# Altium PCB EPM3032_breakout.PcbDoc
Units mil, origin at the board's own origin, x right, y up, seen from the top; angles counter-clockwise.
Board outline 1250 x 1900 mil, 2 copper layers (Top Layer, Bottom Layer); 7 components, 33 nets, 86 pads, 1 vias.
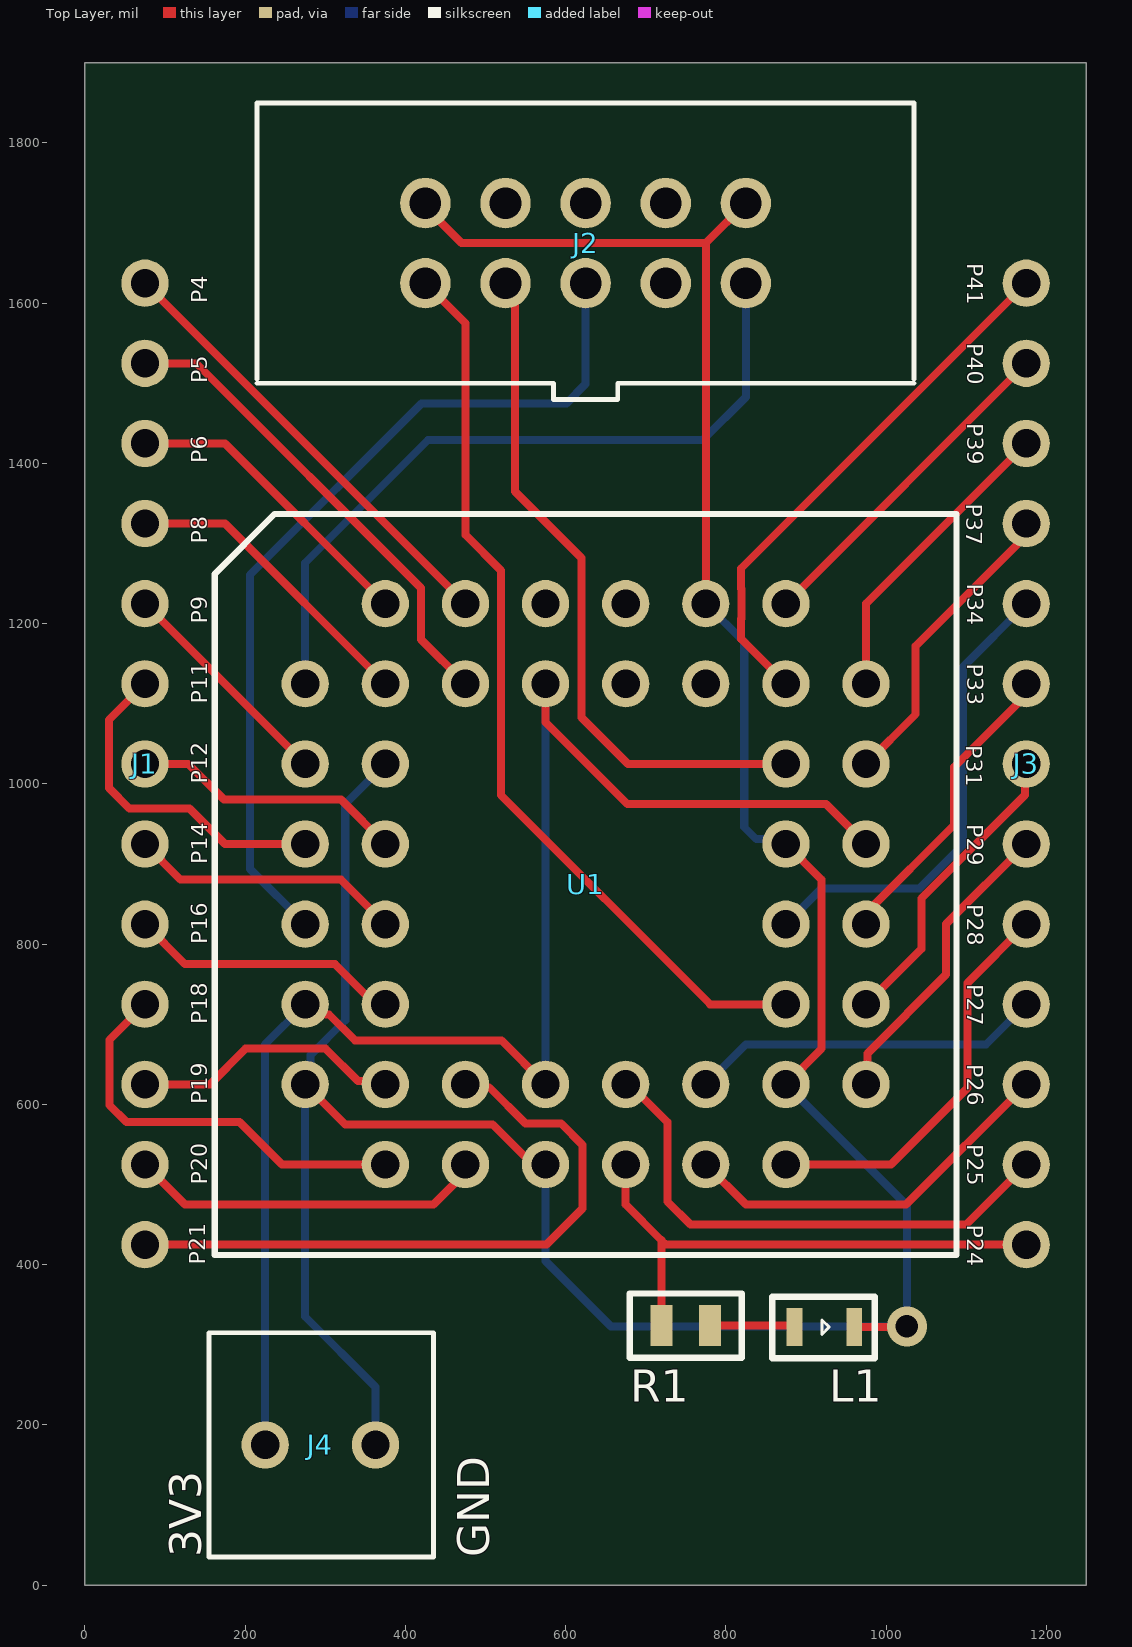
[diagram p0: Top Layer view]
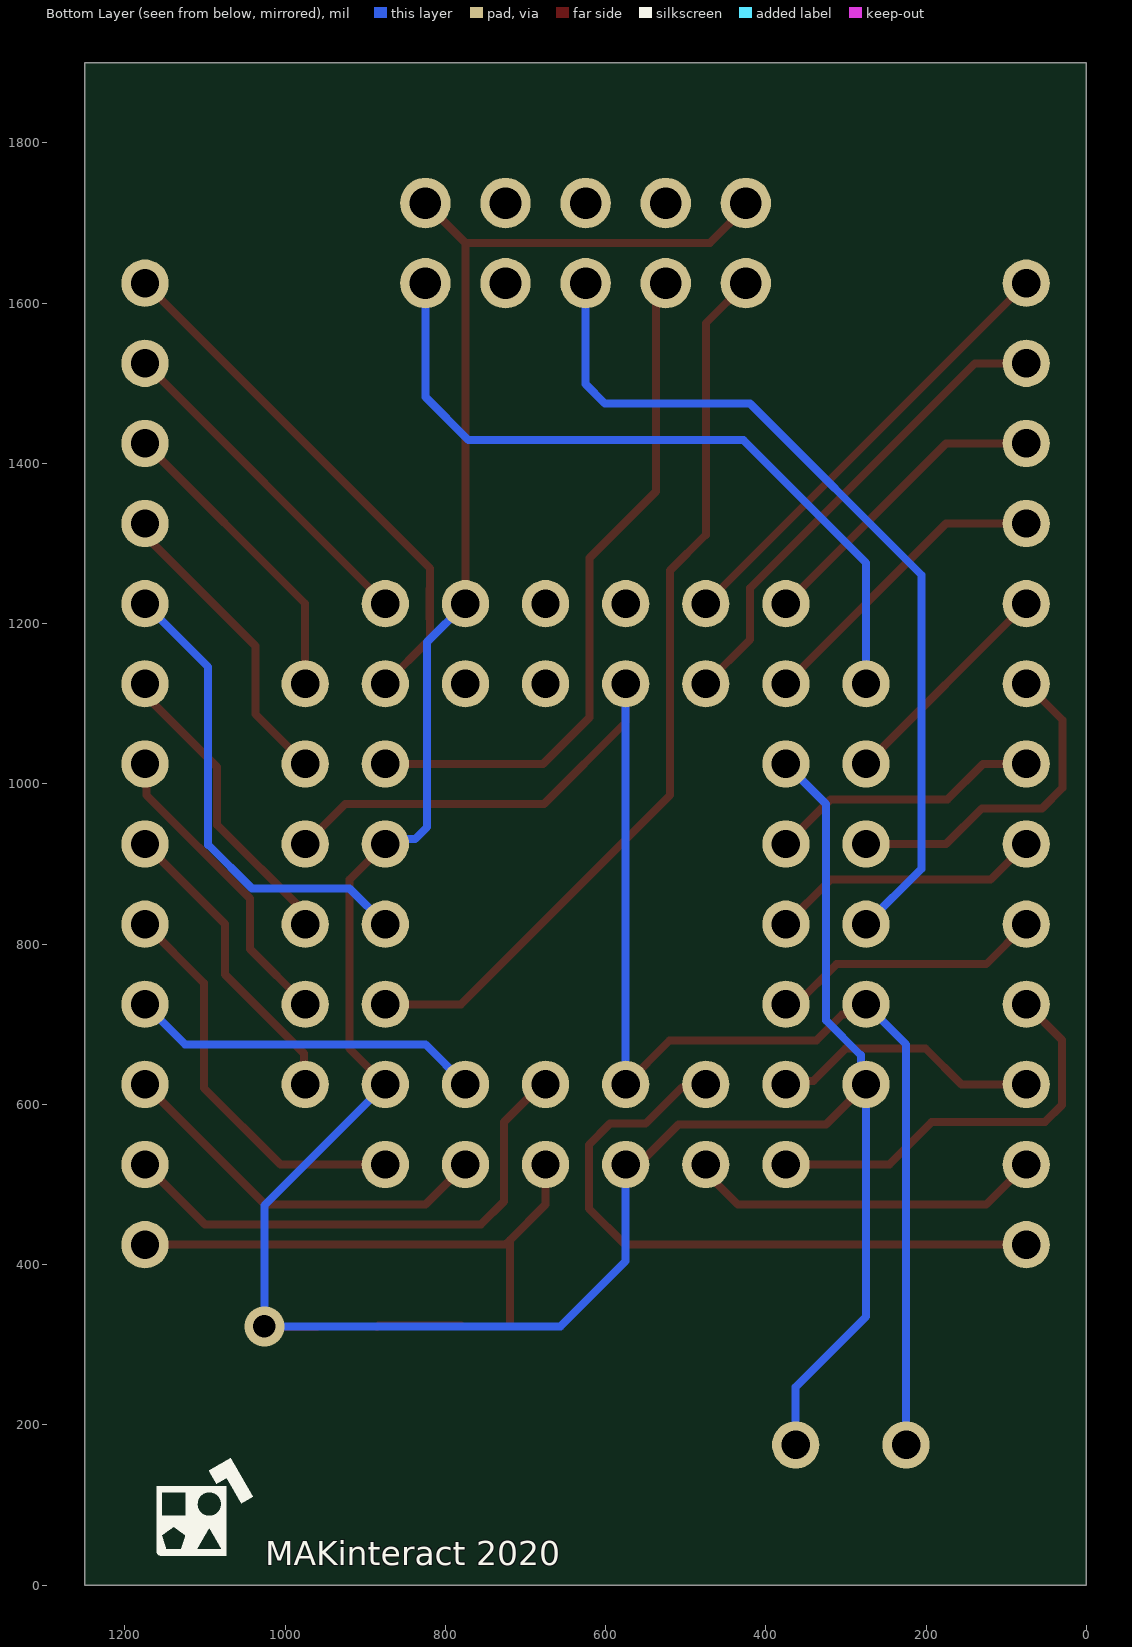
[diagram p1: Bottom Layer view, seen from below]
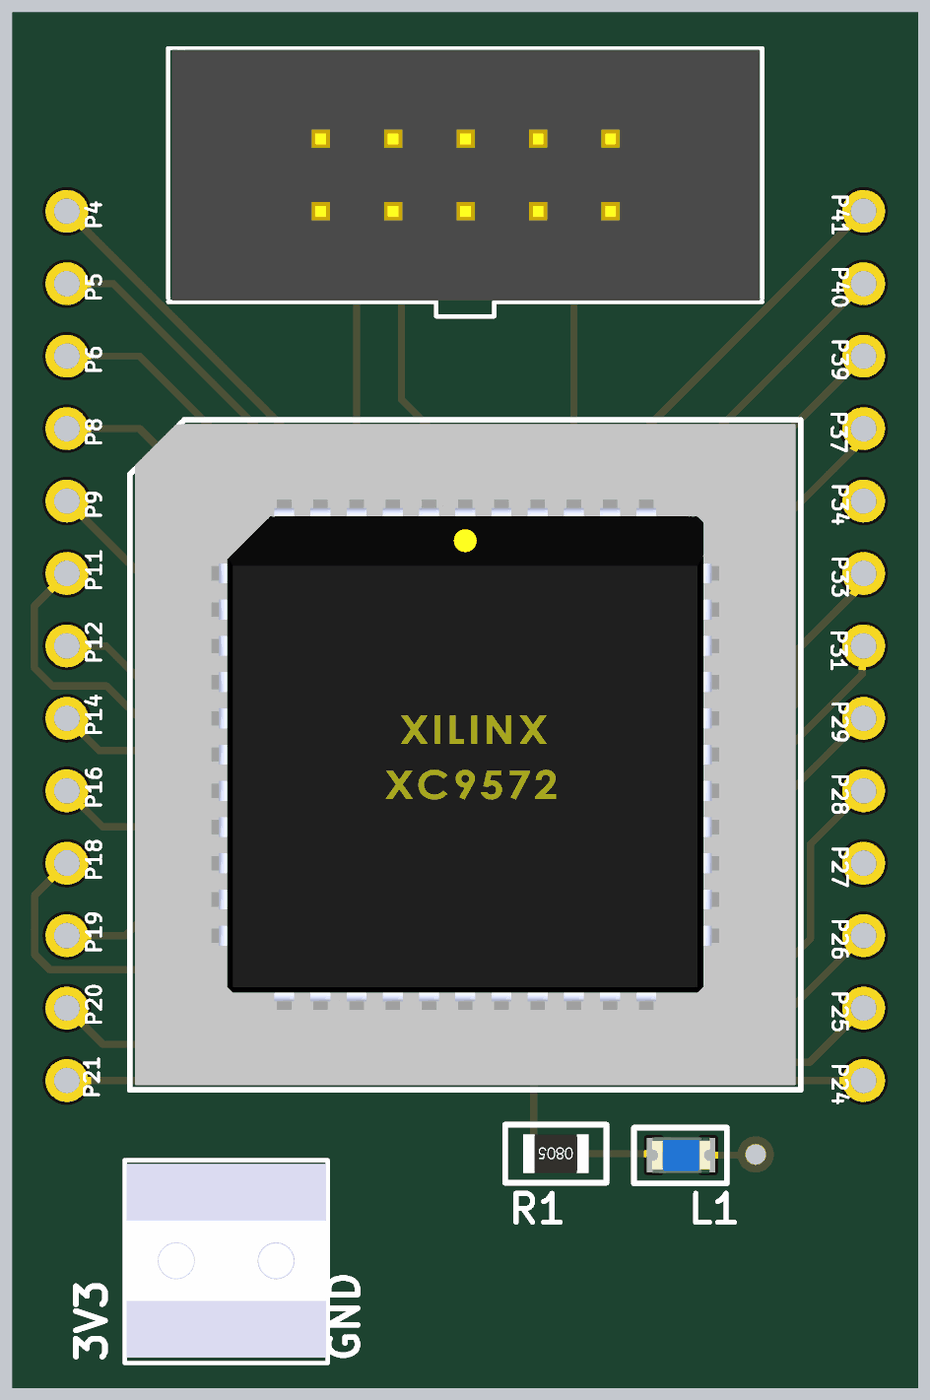
[diagram p2: 3D render of the assembled board from above, using the file's embedded part models]

## Layer stack, top to bottom
Top Solder: solder mask 0.4, Solder Resist, Dk 3.5
Top Layer: signal copper 1.4
Dielectric 1: dielectric 12.6, FR-4, Dk 4.8
Bottom Layer: signal copper 1.4
Bottom Solder: solder mask 0.4, Solder Resist, Dk 3.5

## Board outline
0,0 1250,0 1250,1900 0,1900

## Design rules (kind name [scope] priority, off if disabled: settings)
Clearance [All] p1: gap=10 ignorepadtopadclearanceinfootprint=FALSE except(0: Arc-Hole Track-Hole SMDPad-Hole THPad-Hole Via-Hole Fill-Hole Poly-Hole Region-Hole Text-Hole)
PolygonConnect [All] p1: connectstyle=Relief reliefconductorwidth=10 reliefentries=4 polygonreliefangle="90 Angle" airgapwidth=10
RoutingVias [All] p1: holewidth=28 width=50 viastyle="Through Hole" minholewidth=28 minwidth=50 maxholewidth=28 maxwidth=50
SilkToSilkClearance [All] p1: silktosilkclearance=5
SolderMaskExpansion [All] p1: expansion=4
Width [All] p1: maxlimit=10 minlimit=10 preferedwidth=10
29 further rules are at their usual default settings.

## Components (designator, comment, footprint, x,y, rotation, side; value= is the part's Value field where it differs from the comment)
J1 "connector_1x13" CONECTOR_1X13 75,1625 r270 top
J2 "ALTERA BLASTER" ALTERA_BLASTER 425,1625 r0 top locked
J3 "connector_1x13" CONECTOR_1X13 1175,425 r90 top
J4 "282837-2" 282837-2 225,175 r0 top
L1 "LED0805" LED0805 923,322 r180 top
R1 "300" R0805 750,324 r180 top
U1 "EPM3064ALC44-10" PLCC44_DIP 625,875 r0 top locked

## Footprints (in the part's own frame and the unit in brackets; to place one, negate y for a bottom-side part, rotate by r counter-clockwise, add the part's x,y. Pads: shape width x height; smd on the part's side, far side on the other; paste and mask are expansions set on the pad)
282837-2 [mm]
  round 1.5 hole 0.9: 1(0,0) 2(3.5,0)
  silkscreen extent -1.78,-3.56 5.33,3.56, body extent -1.72,-3.37 5.28,3.43, height 9.2
ALTERA_BLASTER [mm]
  round 1.6 hole 1: 1(0,0) 2(0,2.54) 3(2.54,0) 4(2.54,2.54) 5(5.08,0) 6(5.08,2.54) 7(7.62,0) 8(7.62,2.54) 9(10.16,0) 10(10.16,2.54)
  silkscreen extent -5.33,-3.68 15.49,5.71, body extent -5.21,-3.13 15.39,5.67, height 9.11
CONECTOR_1X13 [mm]
  round 1.5 hole 0.9: 1(0,0) 2(2.54,0) 3(5.08,0) 4(7.62,0) 5(10.16,0) 6(12.7,0) 7(15.24,0) 8(17.78,0) 9(20.32,0) 10(22.86,0) 11(25.4,0) 12(27.94,0) 13(30.48,0)
LED0805 [mm]
  rect 0.5x1.2 smd: 1(-0.95,0) 2(0.95,0)
  silkscreen extent -1.6,-0.97 1.65,0.99, body extent -1.01,-0.62 1.01,0.63, height 1.1
PLCC44_DIP [mm]
  round 1.5 hole 0.9: 1(1.27,6.35) 2(-1.27,8.89) 3(-1.27,6.35) 4(-3.81,8.89) 5(-3.81,6.35) 6(-6.35,8.89) 7(-8.89,6.35) 8(-6.35,6.35) 9(-8.89,3.81) 10(-6.35,3.81) 11(-8.89,1.27) 12(-6.35,1.27) 13(-8.89,-1.27) 14(-6.35,-1.27) 15(-8.89,-3.81) 16(-6.35,-3.81) 17(-8.89,-6.35) 18(-6.35,-8.89) 19(-6.35,-6.35) 20(-3.81,-8.89) 21(-3.81,-6.35) 22(-1.27,-8.89) 23(-1.27,-6.35) 24(1.27,-8.89) 25(1.27,-6.35) 26(3.81,-8.89) 27(3.81,-6.35) 28(6.35,-8.89) 29(8.89,-6.35) 30(6.35,-6.35) 31(8.89,-3.81) 32(6.35,-3.81) 33(8.89,-1.27) 34(6.35,-1.27) 35(8.89,1.27) 36(6.35,1.27) 37(8.89,3.81) 38(6.35,3.81) 39(8.89,6.35) 40(6.35,8.89) 41(6.35,6.35) 42(3.81,8.89) 43(3.81,6.35) 44(1.27,8.89)
  silkscreen extent -11.76,-11.76 11.76,11.73, body extent -11.59,-11.59 11.59,11.59, height 9
R0805 [mm]
  rect 0.7x1.3 smd mask+0.02: 1(-0.775,0) 2(0.775,0)
  silkscreen extent -1.78,-1.02 1.78,1.02, body extent -1.15,-0.67 1.15,0.68, height 0.77

## Part data
J2: library part ALTERA_JTAG
J4: "Conn Terminal Blocks F 2 POS 5.08mm Solder ST Thru-Hole 13.5A/Contact", Color=Green, Current=13.5A, Flammability Rating="UL94 V-0", Manufacturer="TE Connectivity", Max Supply Voltage (AC)=250V, Package Quantity=300, Supplier Part Number 1=A113320-ND, Voltage=300V, Approvals=UL, Closed End="No (Without)", ComponentLink1Description=https://datasheet.ciiva.com/819/eng-cs-1308389-eurostyle-terminal-blocks-0607-819104.pdf?src-supplier=Avnet, ComponentLink1URL=https://datasheet.ciiva.com/819/eng-cs-1308389-eurostyle-terminal-blocks-0607-819104.pdf?src-supplier=Avnet, ComponentLink2Description=https://datasheet.ciiva.com/16305/eng-cs-1308389-eurostyle-terminal-blocks-0607-16305248.pdf?src-supplier=Future+Electronics, ComponentLink2URL=https://datasheet.ciiva.com/16305/eng-cs-1308389-eurostyle-terminal-blocks-0607-16305248.pdf?src-supplier=Future+Electronics, ComponentLink3Description=https://datasheet.ciiva.com/19467/750688-19467564.pdf?src-supplier=Jameco, ComponentLink3URL=https://datasheet.ciiva.com/19467/750688-19467564.pdf?src-supplier=Jameco, ComponentLink4Description=https://datasheet.ciiva.com/11758/0900766b80e7dc97-11758677.pdf?src-supplier=RSComponents, ComponentLink4URL=https://datasheet.ciiva.com/11758/0900766b80e7dc97-11758677.pdf?src-supplier=RSComponents, ComponentLink5Description=https://datasheet.ciiva.com/7978/1650926-7978569.pdf?src-supplier=Element14, ComponentLink5URL=https://datasheet.ciiva.com/7978/1650926-7978569.pdf?src-supplier=Element14, ComponentLink6Description=https://datasheet.ciiva.com/14606/70086281-14606908.pdf?src-supplier=Allied+Electronics, ComponentLink6URL=https://datasheet.ciiva.com/14606/70086281-14606908.pdf?src-supplier=Allied+Electronics, ComponentLink7Description=https://datasheet.ciiva.com/30084/eng-cs-1308389-eurostyle-terminal-blocks-0607-30084269.pdf?src-supplier=Onlinecomponents.com, ComponentLink7URL=https://datasheet.ciiva.com/30084/eng-cs-1308389-eurostyle-terminal-blocks-0607-30084269.pdf?src-supplier=Onlinecomponents.com, ComponentLink8Description=https://datasheet.ciiva.com/823/eng-cd-282837-g3-823439.pdf?src-supplier=Digi-Key, ComponentLink8URL=https://datasheet.ciiva.com/823/eng-cd-282837-g3-823439.pdf?src-supplier=Digi-Key, ComponentLink9Description=https://datasheet.ciiva.com/16649/eng-cs-1308389-eurostyle-terminal-blocks-0607-16649391.pdf?src-supplier=Avnet+Europe, ComponentLink9URL=https://datasheet.ciiva.com/16649/eng-cs-1308389-eurostyle-terminal-blocks-0607-16649391.pdf?src-supplier=Avnet+Europe, ComponentLink10Description=https://datasheet.ciiva.com/18620/eng-cd-282837-g3-18620917.pdf?src-supplier=Digi-Key, ComponentLink10URL=https://datasheet.ciiva.com/18620/eng-cd-282837-g3-18620917.pdf?src-supplier=Digi-Key, Connector Type=Receptacle, Contact Material=Brass, Contact Plating=Tin, Current Rating=13.5A, Depth=8.2mm, ELV=Compliant, Gender=Female, Height=11.5mm, Housing Color=Green, Housing Material=Polyamide, Interlock="Yes (With)", Lead Free="Lead Free", Length=10.76mm, Manufacturer Part Number=282837-2, Max Current Rating=13.5A, Max Voltage Rating (AC)=250V, Mount="Through Hole", Number of Circuits=2, Number of Contacts=2, Number of Levels=1, Number of Poles=2, Number of Positions=2, Number of Positions Per Level=2, Number of Rows=1, Orientation=Straight, Packaging=Bulk, Pitch=5.08mm, Plating=Brass, Pricing 1="1 = 1.04000, 10 = 0.64700, 25 = 0.55400, 50 = 0.49780, 100 = 0.48750, 250 = 0.41492, 500 = 0.39416, 1000 = 0.35267, 5000 = 0.27591 (USD)", Radiation Hardening=No, REACH SVHC=Unknown, RoHS=Yes, Screw Flange="No (Without)", Screwless Terminal Block="No (Without)", Side Stackable="Yes (With)", Stock 1=133598, Supplier 1=Digi-Key, Tail Length=3.5mm, Termination=Solder, Thread Size=M3, Voltage Rating=250V, Voltage Rating (AC)=250V, Width=11.5mm, Wire/Cable Gauge=30AWG, Wire Gauge (Max)=28AWG, Wire Gauge (Min)=16AWG
L1: "LED0805 any color"
R1: library part R0805
U1: "IC CPLD 64MC 10NS 44PLCC", Case/Package=PLCC, Frequency=125MHz, Manufacturer="Intel Altera", Max Frequency=222.2MHz, Max Operating Temperature=70°C, Max Supply Voltage=3.6V, Min Operating Temperature=0°C, Min Supply Voltage=3V, Operating Supply Voltage=3.3V, Package Quantity=130, ComponentLink1Description=https://datasheet.ciiva.com/29887/1723147-29887635.pdf?src-supplier=Jameco, ComponentLink1URL=https://datasheet.ciiva.com/29887/1723147-29887635.pdf?src-supplier=Jameco, ComponentLink2Description=https://datasheet.ciiva.com/15102/getdatasheetpartid-224088-15102743.pdf?src-supplier=Verical, ComponentLink2URL=https://datasheet.ciiva.com/15102/getdatasheetpartid-224088-15102743.pdf?src-supplier=Verical, ComponentLink3Description=https://datasheet.ciiva.com/1406/m3000a-1406963.pdf?src-supplier=Digi-Key, ComponentLink3URL=https://datasheet.ciiva.com/1406/m3000a-1406963.pdf?src-supplier=Digi-Key, Height=3.81mm, Lead Free="Contains Lead", Length=16.59mm, Manufacturer Part Number=EPM3064ALC44-10, Memory Type=EEPROM, Mount="Surface Mount", Number of Gates=1250, Number of I/Os=34, Number of Logic Blocks (LABs)=4, Number of Logic Elements/Cells=4, Number of Macrocells=64, Number of Pins=44, Number of Programmable I/O=34, Packaging=Rail/Tube, Propagation Delay=10ns, Radiation Hardening=No, RoHS=Yes, Speed Grade=10, Stock 1=0, Supplier 1=Digi-Key, Turn-On Delay Time=10ns, Width=16.59mm

## Via types
v1: diameter 50, hole 28, Top Layer to Bottom Layer, tented both sides, 1 vias

## Nets (pads, with @x,y where several pads share a name; then routed paths per layer and width w, separated by ;. In a path a pad name is that pad's centre, name@x,y a point inside that pad or via, vN(x,y) a via of type N, cw(c..) or ccw(c..) an arc to the next point about the centre after c; other vN are vias at no path point)
GND: J2.2 J2.10 J4.2 L1.1 U1.10 U1.17 U1.22 U1.30 U1.36 U1.42 | length 3907.3
  Top Layer w10: U1.17 325,575 509,575 559,525 U1.22 ; J2.2 425,1720 470,1675 775,1675 ; U1.42 775,1675 ; J2.10 775,1675 ; U1.30 919.53,669.53 919.53,880.47 U1.36 ; L1.1 1025,322 v1(1026,323)
  Bottom Layer w10: J4.2 362.8,247.2 275,335 U1.17 281.49,631.49 281.49,661.49 325,705 325,975 U1.10 ; U1.22@576.64,526.64 U1.22 575,404.56 656.56,323 v1(1026,323) 1026,474 U1.30 U1.30@868.51,618.51 ; U1.42 823,1177 823,946 838.01,930.99 869.01,930.99 U1.36
IO4: J1.1 U1.4 | length 565.7
  Top Layer w10: J1.1 U1.4
IO5: J1.2 U1.5 | length 603.2
  Top Layer w10: J1.2 139,1525 419.53,1244.47 419.53,1180.47 U1.5
IO6: J1.3 U1.6 | length 382.8
  Top Layer w10: J1.3 175,1425 U1.6
IO8: J1.4 U1.8 | length 382.8
  Top Layer w10: J1.4 175,1325 U1.8
IO9: J1.5 U1.9 | length 282.8
  Top Layer w10: J1.5 U1.9
IO11: J1.6 U1.11 | length 422.6
  Top Layer w10: J1.6 30,1080 30,995.03 55.5,969.53 130.47,969.53 175,925 U1.11
IO12: J1.7 U1.12 | length 341.4
  Top Layer w10: J1.7 129,1025 173.53,980.47 319.53,980.47 U1.12
IO14: J1.8 U1.14 | length 341.4
  Top Layer w10: J1.8 119.53,880.47 319.53,880.47 U1.14
IO16: J1.9 U1.16 | length 341.4
  Top Layer w10: J1.9 125,775 312.03,775 362.03,725 U1.16
IO18: J1.10 U1.18 | length 519.4
  Top Layer w10: J1.10 30.47,680.47 30.47,599.39 51.86,578 193,578 246,525 U1.18
IO19: J1.11 U1.19 | length 336.9
  Top Layer w10: J1.11 156,625 200.53,669.53 300.47,669.53 340.86,629.14 370.86,629.14 U1.19
IO20: J1.12 U1.20 | length 447.3
  Top Layer w10: J1.12 125,475 435,475 475,515 U1.20
IO21: J1.13 U1.21 | length 821.4
  Top Layer w10: J1.13 576,425 621,470 621,549.53 594.53,576 550,576 504.67,621.33 478.67,621.33 U1.21
IO24: J3.1 R1.2 U1.24 | length 677.2
  Top Layer w10: U1.24 675,475 719.49,430.51 ; R1.2 719.49,430.51 ; J3.1 725,425 719.49,430.51
IO25: J3.2 U1.25 | length 661.6
  Top Layer w10: U1.25 680,625 727,578 727,478.86 755.86,450 1100,450 J3.2
IO26: J3.3 U1.26 | length 482.8
  Top Layer w10: U1.26 825,475 1025,475 J3.3
IO27: J3.4 U1.27 | length 441.4
  Bottom Layer w10: U1.27 825,675 1125,675 J3.4
IO28: J3.5 U1.28 | length 501
  Top Layer w10: U1.28 1006,525 1101.5,620.5 1101.5,751.5 J3.5
IO29: J3.6 U1.29 | length 382.8
  Top Layer w10: U1.29 976.64,626.64 976.64,663.67 1075,762.03 1075,825 J3.6
IO31: J3.7 U1.31 | length 382.8
  Top Layer w10: U1.31 1044,794 1044,856.97 1173.36,986.33 1173.36,1023.36 J3.7
IO33: J3.8 U1.33 | length 382.8
  Top Layer w10: U1.33 976.64,826.64 976.64,840.64 1085,949 1085,1021 1175,1111 J3.8
IO34: J3.9 U1.34 | length 595.7
  Bottom Layer w10: U1.34 919.53,869.53 1041.53,869.53 1096,924 1096,1146 J3.9
IO37: J3.10 U1.37 | length 382.8
  Top Layer w10: U1.37 1037,1087 1037,1172 1175,1310 J3.10
IO39: J3.11 U1.39 | length 382.8
  Top Layer w10: U1.39 975,1225 J3.11
IO40: J3.12 U1.40 | length 424.3
  Top Layer w10: U1.40 J3.12
IO41: J3.13 U1.41 | length 670.9
  Top Layer w10: U1.41 819.14,1180.86 819.14,1206.17 819.53,1206.56 819.53,1243.44 819.14,1243.83 819.14,1269.14 J3.13
NetJ2_1: J2.1 U1.32 | length 1141.8
  Top Layer w10: J2.1 475,1575 475,1311 519.53,1266.47 519.53,985.94 780.47,725 U1.32
NetJ2_3: J2.3 U1.38 | length 860.4
  Top Layer w10: J2.3 537,1613 537,1365 620,1282 620,1083 678,1025 U1.38
NetJ2_5: J2.5 U1.13 | length 1108.2
  Bottom Layer w10: U1.13 206,894 206,1261 420,1475 601,1475 625,1499 J2.5
NetJ2_9: J2.9 U1.7 | length 928.7
  Bottom Layer w10: U1.7 275,1276 428,1429 771,1429 825,1483 J2.9
NetL1_2: L1.2 R1.1 | length 105.9
  Top Layer w10: R1.1 883.6,324 L1.2
VCC: J4.1 U1.3 U1.15 U1.23 U1.35 | length 1923.1
  Top Layer w10: U1.15 288.27,725 301.26,712.01 304.99,712.01 337,680 520,680 U1.23 ; U1.3 575,1077 677,975 925,975 U1.35
  Bottom Layer w10: J4.1 225,675 U1.15 ; U1.23 U1.3
pads on no net: J2.4 J2.6 J2.7 J2.8 U1.1 U1.2 U1.43 U1.44

## Silkscreen, mask and mechanical layers (free items; w line width, h text height)
Top Overlay:
  text "P41" at 1101.5,1650 h20 r270
  text "P4" at 153,1600 h20 r90
  text "P40" at 1101.5,1550 h20 r270
  text "P5" at 153,1500 h20 r90
  text "P39" at 1101.5,1450 h20 r270
  text "P6" at 153,1400 h20 r90
  text "P37" at 1099.86,1350 h20 r270
  text "P8" at 153,1300 h20 r90
  text "P34" at 1101.5,1250 h20 r270
  text "P9" at 153,1200 h20 r90
  text "P33" at 1101.5,1150 h20 r270
  text "P11" at 153,1100 h20 r90
  text "P31" at 1099.86,1048.36 h20 r270
  text "P12" at 153,1000 h20 r90
  text "P29" at 1101.5,950 h20 r270
  text "P14" at 153,900 h20 r90
  text "P28" at 1101.5,850 h20 r270
  text "P16" at 153,800 h20 r90
  text "P27" at 1101.5,750 h20 r270
  text "P18" at 153,700 h20 r90
  text "P26" at 1101.5,650 h20 r270
  text "P19" at 153,600 h20 r90
  text "P25" at 1101.5,550 h20 r270
  text "P20" at 153,500 h20 r90
  text "P24" at 1101.5,450 h20 r270
  text "P21" at 150,400 h20 r90
  text "3V3" at 145,35 h40 r90
  text "GND" at 505,35 h40 r90
Bottom Overlay:
  drawing of 2 lines, arcs and shapes, not listed
  text "MAKinteract 2020" at 1025,25 h30
Boardcutout:
  the board outline again, w3.54